# EAGLE board mega_3_cpx (EAGLE 6.0)

Size 38.1 x 25.4 mm. Coordinates in mm from the lower left corner, seen from the top.
Outline: 0,0 0,25.4 38.1,25.4 38.1,0 0,0
Copper layers (1*16): Top 0.035mm / dielectric 1.5mm / Bottom 0.035mm
Design rules: minimum track width 10mil, minimum drill 24mil, track to track 8mil, track to pad 8mil, pad to pad 8mil, via to via 8mil, smd to smd 8mil, copper to edge 40mil, drill to drill 8mil, minimum pad ring 10mil, minimum via ring 8mil, stop-mask expansion 4mil, vias tented up to drill 0mil, thermal gap 10mil
Holes 3.2 mm at 12.7,12.7 12.7,12.7 25.4,12.7 25.4,12.7

## Footprints (pad centres in the part's own frame; a part is rotated, then mirrored left to right if it is on the bottom)
LED10MM = drill 0.813 pad 1.676 octagon: A -1.27,0 | drill 0.813 pad 1.676 square: K 1.27,0
1X01 = drill 1.016 octagon: 1 0,0

## Placement (x,y rotation side)
00  [LED10MM]  6.35,6.35 0 top
01  [LED10MM]  19.05,6.35 0 top
02  [LED10MM]  31.75,6.35 0 top
10  [LED10MM]  6.35,19.05 0 top
11  [LED10MM]  19.05,19.05 0 top
12  [LED10MM]  31.75,19.05 0 top
H0  [1X01]  16.51,12.7 0 top
H1  [1X01]  19.05,12.7 0 top
H2  [1X01]  21.59,12.7 0 top

## Library data of the parts
00 01 02 10-12 = led
H0 H1 H2 = pinhead

## Nets
D: 00.A 02.K 11.A 12.K H2.1
S0: 00.K 01.A 02.A 10.K H0.1
S1: 01.K 10.A 11.K 12.A H1.1

## Tracks (layer width: path | path; a pad name or v marks a point on that pad's centre or on a via)
D  (4 unrouted)
S0  (4 unrouted)
S1  (4 unrouted)